# EAGLE board heatbed_20x14-1.3 (EAGLE 6.1)
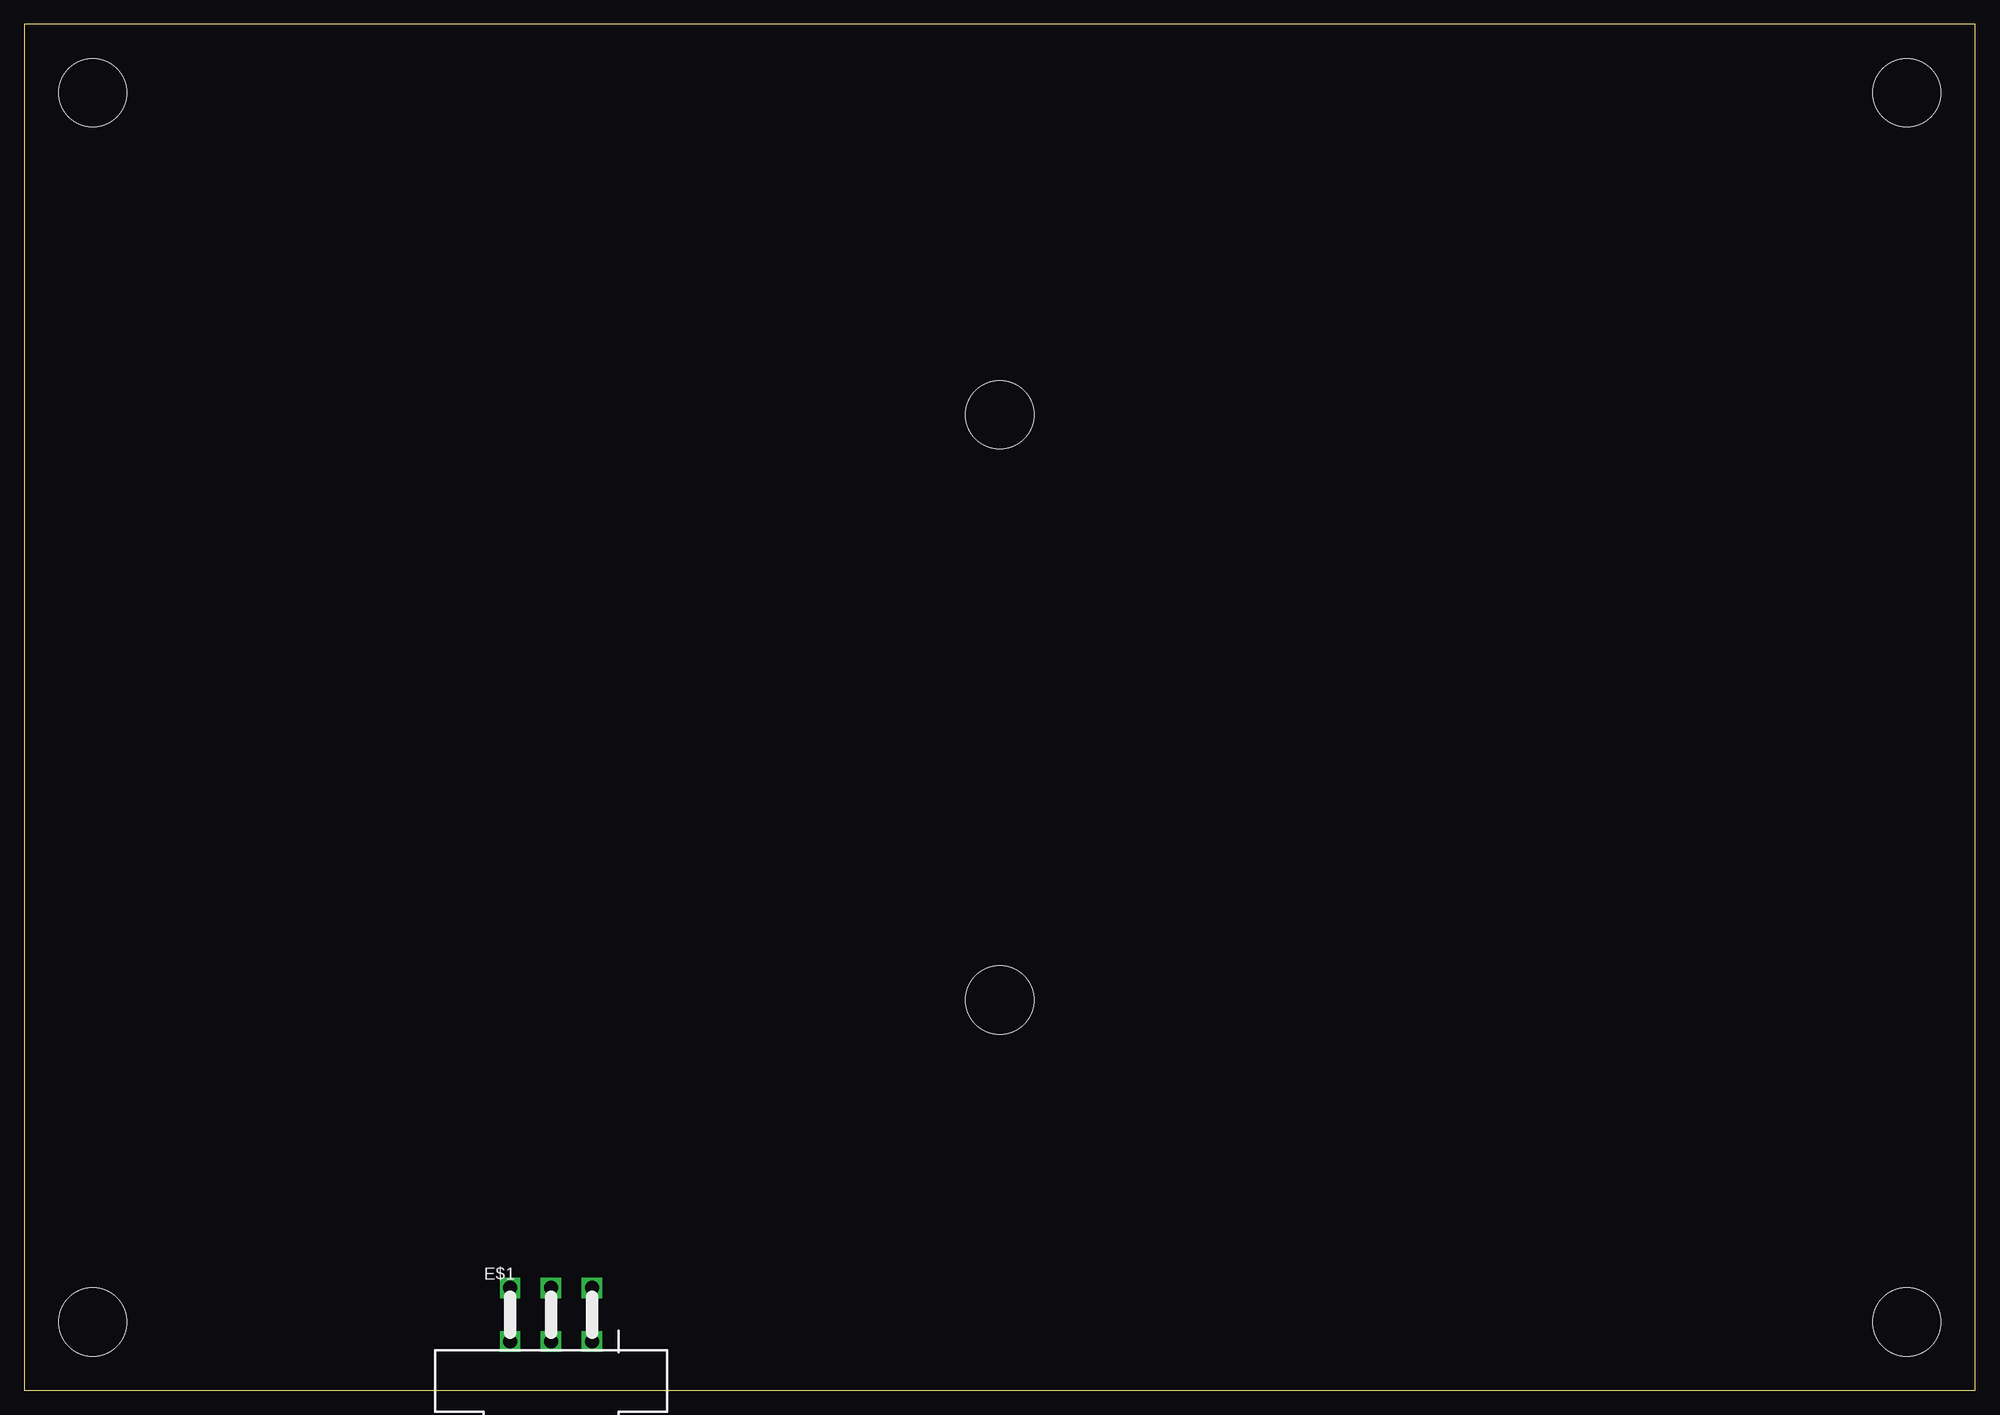
[diagram p0: board, top side]
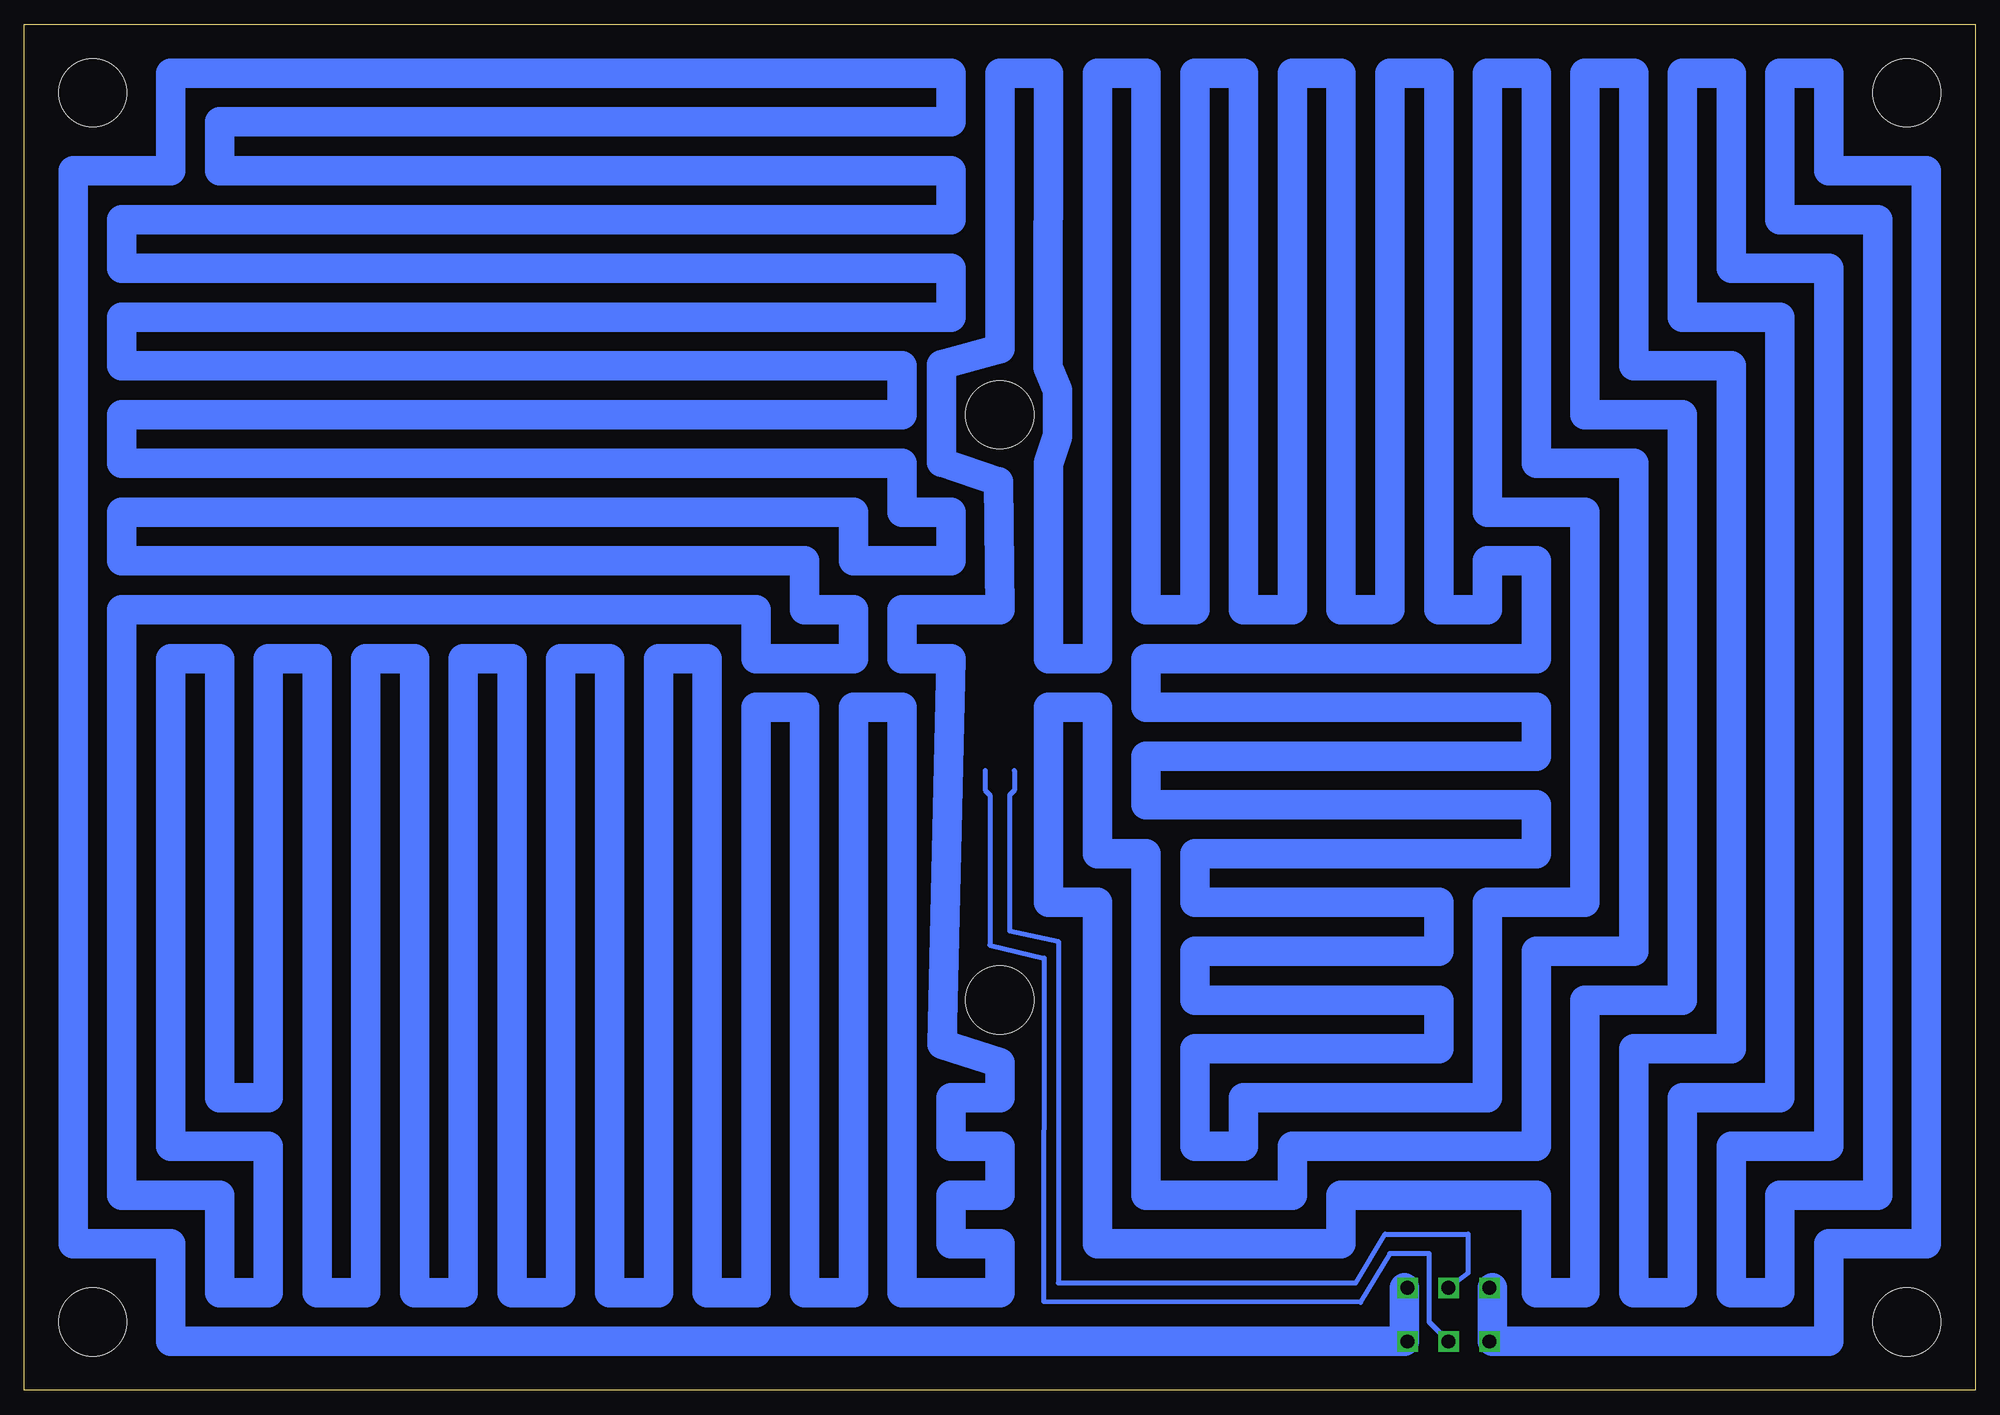
[diagram p1: board, bottom side, seen from below]

Size 200 x 140 mm. Coordinates in mm from the lower left corner, seen from the top.
Outline: 0,0 200,0 200,140 0,140 0,0
Copper layers (1*16): Top 0.035mm / dielectric 1.5mm / Bottom 0.035mm
Design rules: minimum track width 10mil, minimum drill 24mil, track to track 8mil, track to pad 8mil, pad to pad 8mil, via to via 8mil, smd to smd 8mil, copper to edge 40mil, drill to drill 8mil, minimum pad ring 10mil, minimum via ring 8mil, stop-mask expansion 4mil, vias tented up to drill 0mil, thermal gap 10mil
Holes 7 mm at 7,7 193,7 193,133 7,133 100,100 100,40

## Footprints (pad centres in the part's own frame; a part is rotated, then mirrored left to right if it is on the bottom)
5569-6 = drill 1.4 square: 1 4.2,0; 2 0,0; 3 -4.2,0; 4 4.2,5.5; 5 0,5.5; 6 -4.2,5.5

## Placement (x,y rotation side)
E$1  [5569-6]  54,5 0 top

## Library data of the parts
E$1 = local-lib

## Nets
S$4: E$1.5
S$23: E$1.2

## Tracks (layer width: path | path; a pad name or v marks a point on that pad's centre or on a via)
S$4
  Bottom 0.5: 98.5,63.5 98.5,61.5 99,61 99,47.08 94,46 94,11 63.5,11 60.5,16 52,16 52,12 E$1.5
S$5
  Bottom 3: 58.5,10.5 58.5,5 185,5 185,15 195,15 195,125 185,125 185,135 105,135 105,130 180,130 180,125 105,125 105,120 190,120 190,115 105,115 105,110 190,110 190,105 110,105 110,100 190,100 190,95 110,95 110,90 105,90 105,85 115,85 115,90 190,90 190,85 120,85 120,80 115,80 115,75 125,75 125,80 190,80 190,20 180,20 180,10 175,10 175,25 185,25 185,75 180,75 180,30 175,30 175,75 170,75 170,10 165,10 165,75 160,75 160,10 155,10 155,75 150,75 150,10 145,10 145,75 140,75 140,10 135,10 135,75 130,75 130,10 125,10 125,70 120,70 120,10 115,10 115,70 110,70 110,10 100,10 100,15 105,15 105,20 100,20 100,25 105,25 105,30 100,30 99.97,33.58 105.92,35.45 105,75 110,75 110,80 100,80 100.11,93.13 105.97,95.11 105.97,105.11 99.97,106.74 100,135 95,135 95.06,104.86 94.06,102.52 94.06,97.76 95,95 95,75 90,75 90,135 85,135 85,80 80,80 80,135 75,135 75,80 70,80 70,135 65,135 65,80 60,80 60,135 55,135 55,80 50,80 50,85 45,85 45,75 85,75 85,70 45,70 45,65 85,65 85,60 45,60 45,55 80,55 80,50 55,50 55,45 80,45 80,40 55,40 55,35 80,35 80,25 75,25 75,30 50,30 50,50 40,50 40,90 50,90 50,135 45,135 45,95 35,95 35,45 45,45 45,25 70,25 70,20 85,20 85,55 90,55 90,70 95,70 95,50 90,50 90,15 65,15 65,20 45,20 45,10 40,10 40,40 30,40 30,100 40,100 40,135 35,135 35,105 25,105 25,35 35,35 35,10 30,10 30,30 20,30 20,110 30,110 30,135 25,135 25,115 15,115 15,25 25,25 25,10 20,10 20,20 10,20 10,120 20,120 20,135 15,135 15,125 5,125 5,15 15,15 15,5 49.5,5 49.5,10.5
S$23
  Bottom 0.5: 101.5,63.5 101.5,61.5 101,61 101,45.63 95.44,44.29 95.52,9.07 63,9 60,14 56,14 56,7 E$1.2